# EAGLE board Shift_Register_2IO_Breakout (EAGLE 9.6.2)
AUTHOR: Adam Billingsley; VERSION: v1.0
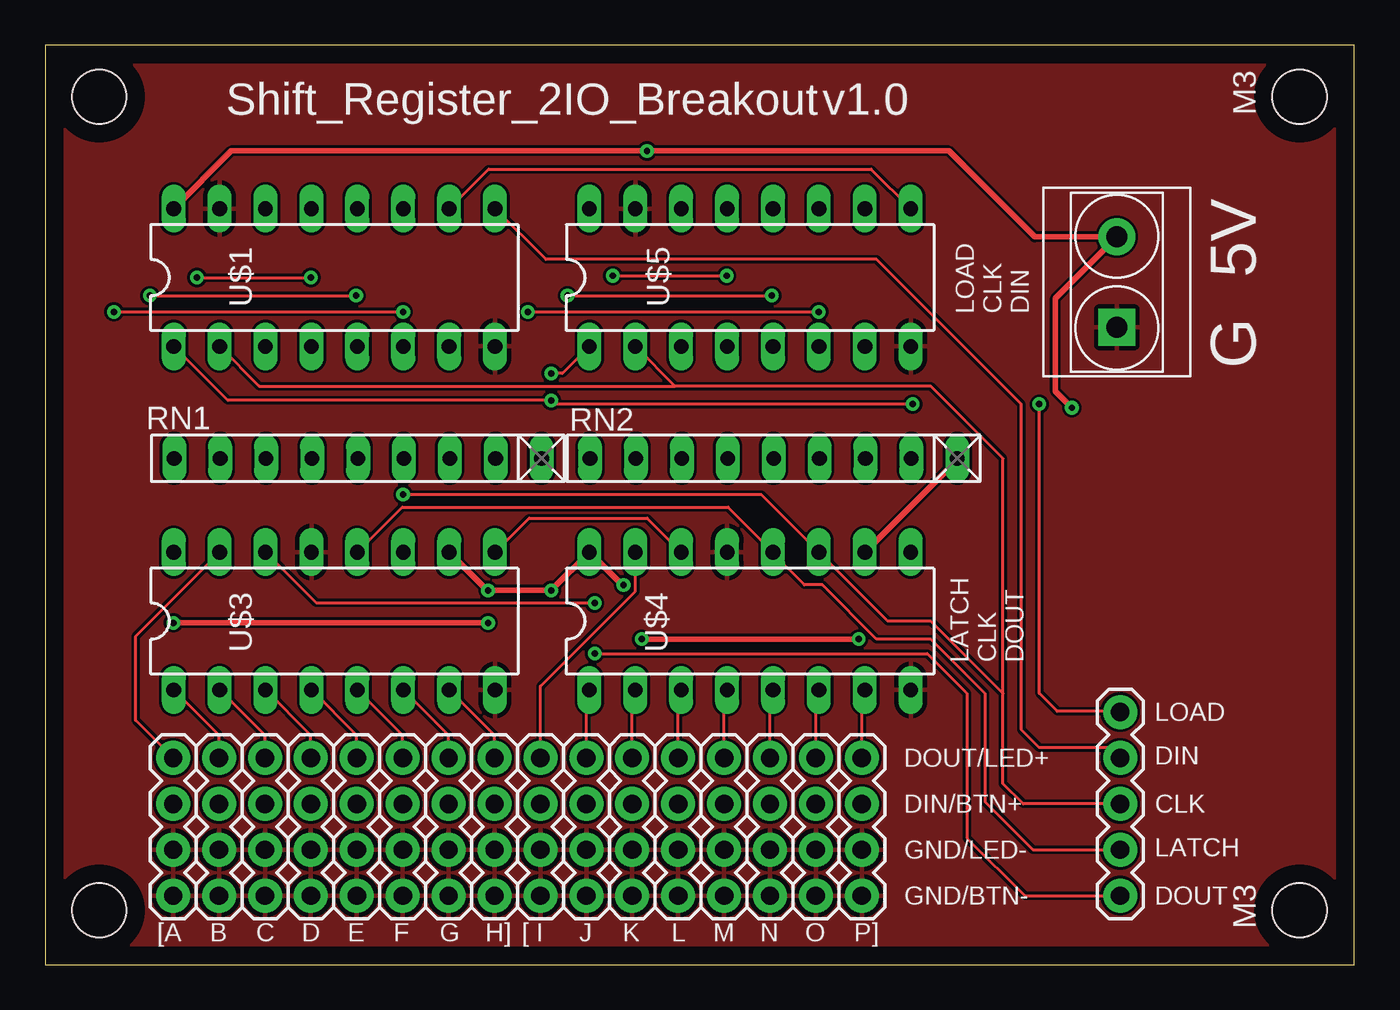
[diagram p0: board, top side]
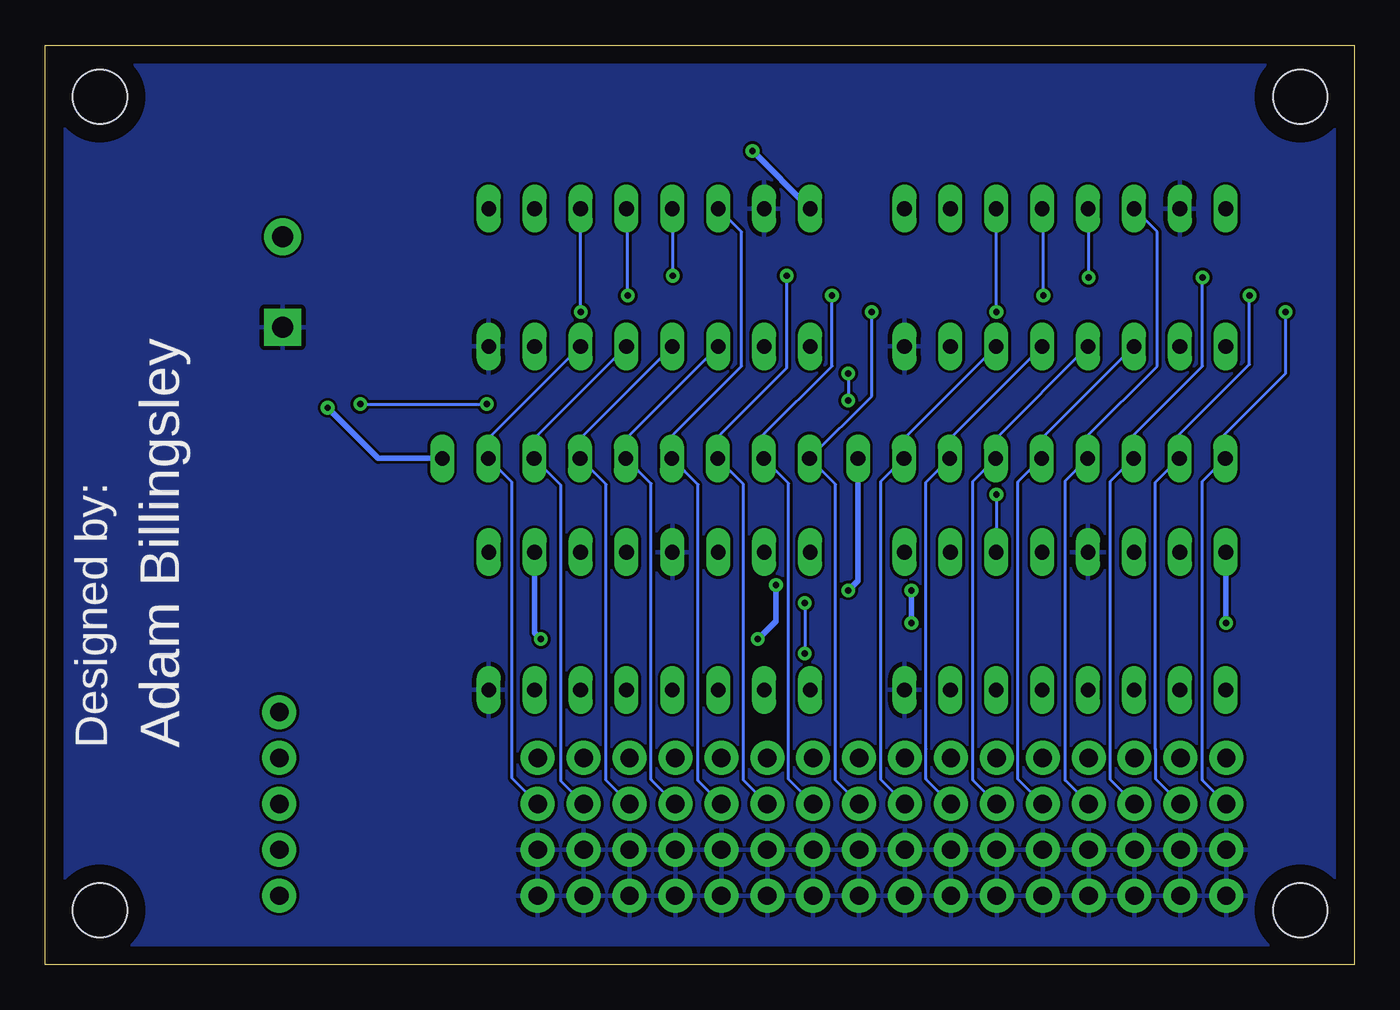
[diagram p1: board, bottom side, seen from below]

Size 72.43 x 50.85 mm. Coordinates in mm from the lower left corner, seen from the top.
Outline: 0,0 72.43,0 72.43,50.85 0,50.85 0,0
Copper layers (1*16): Top 0.035mm / dielectric 1.5mm / Bottom 0.035mm
Design rules "default": minimum track width 6mil, minimum drill 0.35mm, track to track 6mil, track to pad 6mil, pad to pad 6mil, via to via 6mil, smd to smd 6mil, copper to edge 40mil, drill to drill 6mil, minimum pad ring 10mil, minimum via ring 8mil, stop-mask expansion 4mil, vias tented up to drill 0mil, thermal gap 10mil
Holes 3 mm at 3,3 3,48 69.4,48 69.4,3

## Footprints (pad centres in the part's own frame; a part is rotated, then mirrored left to right if it is on the bottom)
1X04 = drill 1.016 pad 1.88: 1 0,0; 2 2.54,0; 3 5.08,0; 4 7.62,0
1X05 = drill 1.016 pad 1.88: 1 0,0; 2 2.54,0; 3 5.08,0; 4 7.62,0; 5 10.16,0
RN-9 = drill 0.813 long: 1 -10.16,0; 2 -7.62,0; 3 -5.08,0; 4 -2.54,0; 5 0,0; 6 2.54,0; 7 5.08,0; 8 7.62,0; 9 10.16,0
DIL16 = drill 0.813 long: 1 -8.89,-3.81; 2 -6.35,-3.81; 3 -3.81,-3.81; 4 -1.27,-3.81; 5 1.27,-3.81; 6 3.81,-3.81; 7 6.35,-3.81; 8 8.89,-3.81; 9 8.89,3.81; 10 6.35,3.81; 11 3.81,3.81; 12 1.27,3.81; 13 -1.27,3.81; 14 -3.81,3.81; 15 -6.35,3.81; 16 -8.89,3.81
H2-5.0-10.5X8.0MM = drill 1.168 pad 2.032 square: 1 0,2.5 | drill 1.168 pad 2.032: 2 0,-2.5

## Placement (x,y rotation side)
FRAME1  FRAME-LETTER  [CREATIVE_COMMONS]  21,-8 0 top  (outside the outline)
J0  [1X04]  7.08,11.43 270 top
J1  [1X04]  9.62,11.43 270 top
J2  [1X04]  12.16,11.43 270 top
J3  [1X04]  14.7,11.43 270 top
J4  [1X04]  17.24,11.43 270 top
J5  [1X04]  19.78,11.43 270 top
J6  [1X04]  22.32,11.43 270 top
J7  [1X04]  24.86,11.43 270 top
J8  [1X05]  59.48,3.81 90 top
J9  [1X04]  27.4,11.43 270 top
J10  [1X04]  29.94,11.43 270 top
J11  [1X04]  32.48,11.43 270 top
J12  [1X04]  35.02,11.43 270 top
J13  [1X04]  37.56,11.43 270 top
J14  [1X04]  40.1,11.43 270 top
J15  [1X04]  42.64,11.43 270 top
J16  [1X04]  45.18,11.43 270 top
RN1  4K7  [RN-9]  17.3,28 180 top
RN2  4K7  [RN-9]  40.3,28 180 top
U$1  SN74HC165#0  [DIL16]  16,38 0 top
U$2  TERMINAL_BLOCK_2P  [H2-5.0-10.5X8.0MM]  59.29,37.75 180 top
U$3  SN74HC595#0  [DIL16]  16,19 0 top
U$4  SN74HC595#1  [DIL16]  39,19 0 top
U$5  SN74HC165#1  [DIL16]  39,38 0 top

## Library data of the parts
FRAME1 U$1-U$5 = Adam's Parts (work)
J0 J1-J7 J9-J16 = SparkFun-Connectors; PROD_ID: CONN-09696
J8 = SparkFun-Connectors
RN1 RN2 = resistor-net; OC_FARNELL: unknown; OC_NEWARK: unknown

## Nets
A: J0.2 RN1.9 U$1.11
B: J1.2 RN1.8 U$1.12
C: J2.2 RN1.7 U$1.13
CLK: J8.3 U$1.2 U$3.11 U$4.11 U$5.2
D: J3.2 RN1.6 U$1.14
DIN: J8.4 U$1.9
DOUT: J8.1 U$3.14
E: J4.2 RN1.5 U$1.3
F: J5.2 RN1.4 U$1.4
G: J6.2 RN1.3 U$1.5
GND: J0.3 J0.4 J1.3 J1.4 J2.3 J2.4 J3.3 J3.4 J4.3 J4.4 J5.3 J5.4 J6.3 J6.4 J7.3 J7.4 J9.3 J9.4 J10.3 J10.4 J11.3 J11.4 J12.3 J12.4 J13.3 J13.4 J14.3 J14.4 J15.3 J15.4 J16.3 J16.4 U$1.8 U$1.15 U$2.1 U$3.8 U$3.13 U$4.8 U$4.13 U$5.8 U$5.15
H: J7.2 RN1.2 U$1.6
I: J9.2 RN2.9 U$5.11
J: J10.2 RN2.8 U$5.12
K: J11.2 RN2.7 U$5.13
L: J12.2 RN2.6 U$5.14
LATCH: J8.2 U$3.12 U$4.12
LOAD: J8.5 U$1.1 U$5.1
M: J13.2 RN2.5 U$5.3
N: J14.2 RN2.4 U$5.4
O: J15.2 RN2.3 U$5.5
P: J16.2 RN2.2 U$5.6
PISO0: U$1.10 U$5.9
QA: J0.1 U$3.15
QB: J1.1 U$3.1
QC: J2.1 U$3.2
QD: J3.1 U$3.3
QE: J4.1 U$3.4
QF: J5.1 U$3.5
QG: J6.1 U$3.6
QH: J7.1 U$3.7
QI: J9.1 U$4.15
QJ: J10.1 U$4.1
QK: J11.1 U$4.2
QL: J12.1 U$4.3
QM: J13.1 U$4.4
QN: J14.1 U$4.5
QO: J15.1 U$4.6
QP: J16.1 U$4.7
SIPO0: U$3.9 U$4.14
VCC: RN1.1 RN2.1 U$1.16 U$2.2 U$3.10 U$3.16 U$4.10 U$4.16 U$5.16

## Tracks (layer width: path | path; a pad name or v marks a point on that pad's centre or on a via)
A  (via drill 0.35)
  Top 0.152: v3.8,36.1 v19.8,36.1
  Bottom 0.152: J0.2 8.4,10.21 8.4,26.74 RN1.9 7.14,29.24 7.2,29.3 3.8,32.7 v3.8,36.1 | v19.8,36.1 U$1.11
B  (via drill 0.35)
  Top 0.152: v5.8,37 v17.2,37
  Bottom 0.152: J1.2 10.99,10.26 10.99,11.91 11,11.92 11,26.68 RN1.8 9.68,29.32 5.8,33.2 v5.8,37 | v17.2,37 17.2,41.74 U$1.12
C  (via drill 0.35)
  Top 0.152: v8.4,38 v14.7,38
  Bottom 0.152: J2.2 13.5,10.23 13.5,26.72 RN1.7 12.22,29.28 8.4,33.1 v8.4,38 | v14.7,38 14.7,41.78 U$1.13
CLK  (via drill 0.35)
  Top 0.152: U$1.2 11.84,32 34.84,32 | J8.3 54.11,8.89 53,10 53,15 | 53,15 49,19 46.62,19 U$4.11 39.62,26 v19.8,26 | 53,15 53,28 49,32 34.84,32 | U$5.2 34.84,32
  Bottom 0.152: v19.8,26 U$3.11
D
  Bottom 0.152: J3.2 16,10.19 16,26.76 RN1.6 14.76,29.24 10.9,33.1 10.9,40.52 U$1.14
DIN
  Top 0.152: J8.4 58.91,12 55,12 54,13 54,31 46,39 27.7,39 U$1.9
DOUT  (via drill 0.35)
  Top 0.152: U$3.14 15,20 v30.4,20 | v30.4,17.2 48.8,17.2 51,15 51,7 54.19,3.81 J8.1
  Bottom 0.152: v30.4,20 v30.4,17.2
E
  Bottom 0.152: J4.2 18.6,10.25 18.6,26.7 RN1.5 17.3,29.08 U$1.3
F
  Bottom 0.152: J5.2 21.1,10.21 21.1,26.74 RN1.4 19.84,29.08 U$1.4
G
  Bottom 0.152: J6.2 23.69,10.26 23.69,11.91 23.7,11.92 23.7,26.68 RN1.3 22.38,29.08 U$1.5
GND
  pour Top: 0,0 0,51 72,51 72.5,51 72.5,0
  pour Bottom: 0,0 0,51 72.5,51 72.5,0
H
  Bottom 0.152: J7.2 26.2,10.23 26.2,26.72 RN1.2 24.92,29.08 U$1.6
I  (via drill 0.35)
  Top 0.152: v26.7,36.1 v42.8,36.1
  Bottom 0.152: J9.2 28.7,10.19 28.7,26.56 RN2.9 26.7,31.44 v26.7,36.1 | v42.8,36.1 U$5.11
J  (via drill 0.35)
  Top 0.152: v28.9,37 v40.2,37
  Bottom 0.152: J10.2 31.3,10.25 31.3,26.62 RN2.8 32.68,29.32 28.9,33.1 v28.9,37 | v40.2,37 40.2,41.74 U$5.12
K  (via drill 0.35)
  Top 0.152: v31.4,38.1 v37.7,38.1
  Bottom 0.152: J11.2 33.8,10.21 33.8,26.58 RN2.7 35.2,28.02 35.2,29.2 31.4,33 v31.4,38.1 | v37.7,38.1 37.7,41.78 U$5.13
L
  Bottom 0.152: J12.2 36.3,10.17 36.3,26.54 RN2.6 37.76,29.24 33.9,33.1 33.9,40.52 U$5.14
LATCH
  Top 0.152: U$3.12 19.76,25.3 37.78,25.3 U$4.12 40.27,22.73 42,21 43,21 46,18 49,18 52,15 52,9 54.65,6.35 J8.2
LOAD  (via drill 0.35)
  Top 0.152: U$5.1 28.62,32.7 v28,32.7 | U$1.1 10.1,31.2 v28,31.2 28.2,31 v48,31 | J8.5 59.45,14 56,14 55,15 v55,31
  Bottom 0.152: v28,32.7 v28,31.2 | v55,31 v48,31
M
  Bottom 0.152: J13.2 38.9,10.23 38.9,26.6 RN2.5 40.3,29.08 U$5.3
N
  Bottom 0.152: J14.2 41.4,10.19 41.4,26.56 RN2.4 42.84,29.08 U$5.4
O
  Bottom 0.152: J15.2 43.9,10.15 43.9,26.52 RN2.3 45.38,29.08 U$5.5
P
  Bottom 0.152: J16.2 46.6,10.31 46.6,26.68 RN2.2 47.92,29.08 U$5.6
PISO0
  Top 0.152: U$1.10 24.54,44 45.7,44 U$5.9
QA
  Top 0.152: J0.1 5,13.51 5,18.16 U$3.15
QB
  Top 0.152: J1.1 9.62,12.68 U$3.1
QC
  Top 0.152: J2.1 12.16,12.68 U$3.2
QD
  Top 0.152: J3.1 14.7,12.68 U$3.3
QE
  Top 0.152: J4.1 17.24,12.68 U$3.4
QF
  Top 0.152: J5.1 19.78,12.68 U$3.5
QG
  Top 0.152: J6.1 22.32,12.68 U$3.6
QH
  Top 0.152: J7.1 24.86,12.68 U$3.7
QI
  Top 0.152: J9.1 27.4,15.4 32.65,20.65 U$4.15
QJ
  Top 0.152: J10.1 29.94,15.02 U$4.1
QK
  Top 0.152: J11.1 32.48,15.02 U$4.2
QL
  Top 0.152: J12.1 35.02,15.02 U$4.3
QM
  Top 0.152: J13.1 37.56,15.02 U$4.4
QN
  Top 0.152: J14.1 40.1,15.02 U$4.5
QO
  Top 0.152: J15.1 42.64,15.02 U$4.6
QP
  Top 0.152: J16.1 45.18,15.02 U$4.7
SIPO0
  Top 0.152: U$3.9 26.78,24.7 33.3,24.7 U$4.14
VCC  (via drill 0.35)
  Top 0.305: U$1.16 10.3,45 v33.3,45 50,45 54.75,40.25 U$2.2 55.9,36.86 55.9,31.7 v56.8,30.8 | v45,18 v33,18 | v32,21 31.92,21 U$4.16 v28,20.7 v24.5,20.7 24.46,20.7 U$3.10 | v24.5,18.9 v7.1,18.9 | U$4.10 50.46,27.92 RN2.1
  Bottom 0.305: U$4.10 45.35,18.35 v45,18 | v33,18 32,19 v32,21 | v24.5,20.7 v24.5,18.9 | v7.1,18.9 U$3.16 | RN1.1 27.46,21.24 v28,20.7 | U$5.16 v33.3,45 | RN2.1 54,28 v56.8,30.8

## Text on the board
tPlace: M3 | 5V | LOAD / CLK / DIN | G | LATCH / CLK / DOUT | LOAD | DOUT/LED+ | DIN | DIN/BTN+ | CLK | GND/LED- | LATCH | GND/BTN- | DOUT | M3 | [A | B | C | D | E | F | G | H] | [ I | J | K | L | M | N | O | P]
bPlace: Designed by: